# Altium PCB focus_stacking.PcbDoc
Units mil, origin at the board's own origin, x right, y up, seen from the top; angles counter-clockwise.
Board outline 11800 x 7870 mil, 2 copper layers (Top Layer, Bottom Layer); 15 components, 19 nets, 83 pads, 8 vias.
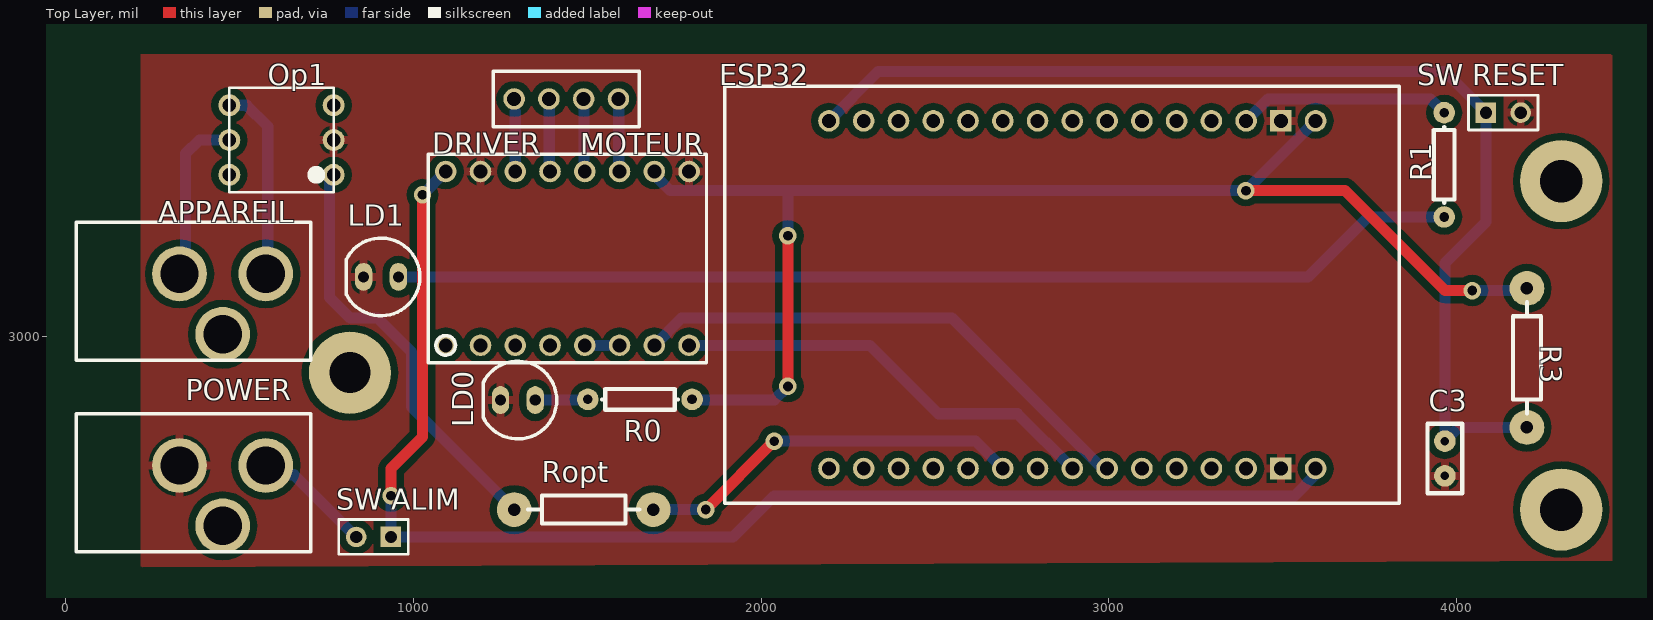
[diagram p0: Top Layer view]
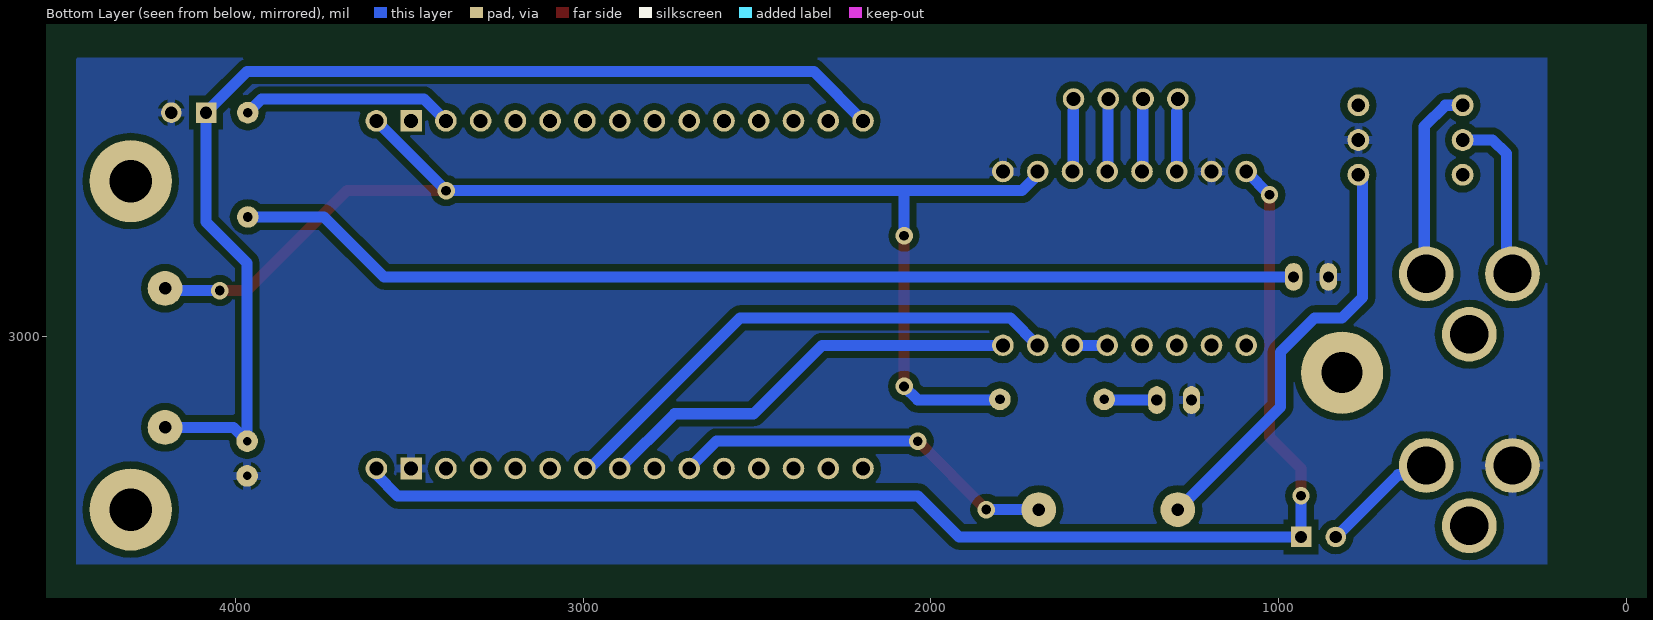
[diagram p1: Bottom Layer view, seen from below]

## Layer stack, top to bottom
Top Solder: solder mask 0.4, Solder Resist, Dk 3.5
Top Layer: signal copper 1.4
Dielectric1: dielectric 12.6, FR-4, Dk 4.8
Bottom Layer: signal copper 1.4
Bottom Solder: solder mask 0.4, Solder Resist, Dk 3.5

## Board outline
-5576.97,-1826.38 6223.03,-1826.38 6223.03,6043.62 -5576.97,6043.62

## Design rules (kind name [scope] priority, off if disabled: settings)
Clearance Clearance_bottom_polygon [OnLayer('Bottom Layer') Or OnLayer('Multi-Layer') vs OnLayer('Bottom Layer')  And  InPoly] p1: gap=20
Clearance Clearance_bottom_polygon_keepout [OnLayer('Bottom Layer') Or OnLayer('Multi-Layer') Or InPoly vs OnLayer('Keepout')] p2: gap=0
Clearance Clearance_top_polygon [OnLayer('Top Layer')  Or OnLayer('Multi-Layer') vs OnLayer('Top Layer') And InPoly] p3: gap=20
Clearance Clearance_bottom [OnLayer('Bottom Layer') Or OnLayer('Multi-Layer') vs OnLayer('Bottom Layer')  And Not InPoly] p4: gap=8
Clearance Clearance_top [OnLayer('Top Layer')  Or OnLayer('Multi-Layer') vs OnLayer('Top Layer') And Not InPoly] p5: gap=8
Clearance Clearance_pad_to_pad [OnLayer('Multi-Layer') vs OnLayer('Multi-Layer')] p6: gap=10
ComponentClearance ComponentClearance_bottom [OnLayer('Bottom Overlay') vs OnLayer('Bottom Overlay')] p1: gap=0 collisioncheckmode=3 verticalgap=10 showdistances=FALSE
ComponentClearance ComponentClearance_top [OnLayer('Top Overlay') vs OnLayer('Top Overlay')] p2: gap=0 collisioncheckmode=3 verticalgap=10 showdistances=FALSE
FabricationTestPointUsage TestPointUsage [All] p1: valid=0 allowmultiple=FALSE
FabricationTestpoint Testpoint [All] p1: side=3 testpointundercomponent=TRUE minsize=40 maxsize=100 preferedsize=60 minholesize=0 maxholesize=40 preferedholesize=32 testpointgrid=1 allowsidetop=TRUE allowsidebottom=TRUE usegrid=TRUE gridtolerance=0.01
HoleSize [All] p1: absolutevalues=TRUE maxlimit=1000 minlimit=16 maxpercent=80.000 minpercent=20.000
MinimumAnnularRing [PadXSize_AllLayers = PadYSize_AllLayers] p1: minimumring=10
PermittedLayers [All] p1: toplayerpermitted=TRUE bottomlayerpermitted=TRUE
PolygonConnect [All] p1: connectstyle=Relief reliefconductorwidth=24 reliefentries=4 polygonreliefangle="90 Angle" airgapwidth=10
RoutingVias [All] p1: holewidth=16 width=50 viastyle="Through Hole" minholewidth=16 minwidth=50 maxholewidth=1000 maxwidth=1000
SMDToPlane [All] p1: distance=0
SolderMaskExpansion [All] p1: expansion=4
ViasUnderSMD [All] p1: allowed=FALSE
Width Width_botom_top [OnLayer('Bottom Layer') or OnLayer('Top Layer')] p1: maxlimit=10000 minlimit=32 preferedwidth=32 minimp=50.000000 maximp=50.000000 favimp=50.000000
26 further rules are at their usual default settings.

## Components (designator, comment, footprint, x,y, rotation, side; value= is the part's Value field where it differs from the comment)
APPAREIL "Connecteur Power" "Connecteur Power" 699.09,3328.57 r180 top
C3 "CAP" RAD0.1 3966.81,2698.65 r270 top
DRIVER "Driver" Driver 1092.8,2974.24 r90 top
ESP32 "ESP32devKit" ESP32 2195.16,2619.91 r90 top
LD0 "comment" LED5 1250.28,2816.76 r270 top
LD1 "comment" LED5 856.57,3171.09 r270 top
MOTEUR "Moteur" Moteur 1289.65,3682.91 r90 top (schematic designator Moteur)
Op1 "Optocoupler" 4N26 620.35,3564.8 r180 top
POWER "Connecteur Power" "Connecteur Power" 699.09,2777.39 r180 top
R0 "RES" AXIAL0.3 1801.46,2816.76 r180 top
R1 "RES" AXIAL0.3 3966.81,3643.54 r270 top
R3 "RES" AXIAL0.4 4203.03,2738.02 r90 top (schematic designator R?)
Ropt "RES" AXIAL0.4 1289.65,2501.8 r0 top
"SW ALIM" "Header 2" HDR1X2 935.31,2423.06 r180 top
"SW RESET" "Header 2" HDR1X2 4084.92,3643.54 r0 top

## Footprints (in the part's own frame and the unit in brackets; to place one, negate y for a bottom-side part, rotate by r counter-clockwise, add the part's x,y. Pads: shape width x height; smd on the part's side, far side on the other; paste and mask are expansions set on the pad)
4N26 [mm]
  round 1.6 hole 1: 1(-3.81,2.54) 2(-3.81,0) 3(-3.81,-2.54) 4(3.81,-2.54) 5(3.81,0) 6(3.81,2.54)
  silkscreen extent -3.81,-3.81 3.81,3.81
AXIAL0.3 [mil]
  round 62 hole 28: 1(0,-2) 2(300,-2)
  silkscreen extent 41,-32 259,28
AXIAL0.4 [mil]
  round 100 hole 36: 1(0,0) 2(400,0)
  silkscreen extent 40,-40 360,40
"Connecteur Power" [mm]
  round 4 hole 2.8: 0(3.15,3.78) 1(9.45,3.78) 2(6.3,8.19)
  silkscreen extent -0.13,0 17.01,10.08
Driver [mm]
  round 1.575 hole 1.016: 1(0,0) 2(0,-2.54) 3(0,-5.08) 4(0,-7.62) 5(0,-10.16) 6(0,-12.7) 7(0,-15.24) 8(0,-17.78) 9(12.7,-17.78) 10(12.7,-15.24) 11(12.7,-12.7) 12(12.7,-10.16) 13(12.7,-7.62) 14(12.7,-5.08) 15(12.7,-2.54) 16(12.7,0)
  silkscreen extent -1.27,-19.05 13.97,1.27
ESP32 [mm]
  round 1.575 hole 1.016: 0(0,0) 1(0,-2.54) 2(0,-5.08) 3(0,-7.62) 4(0,-10.16) 5(0,-12.7) 6(0,-15.24) 7(0,-17.78) 8(0,-20.32) 9(0,-22.86) 10(0,-25.4) 11(0,-27.94) 12(0,-30.48) 14(0,-35.56) 15(25.4,-35.56) 17(25.4,-30.48) 18(25.4,-27.94) 19(25.4,-25.4) 20(25.4,-22.86) 21(25.4,-20.32) 22(25.4,-17.78) 23(25.4,-15.24) 24(25.4,-12.7) 25(25.4,-10.16) 26(25.4,-7.62) 27(25.4,-5.08) 28(25.4,-2.54) 29(25.4,0)
  rect 1.575x1.575 hole 1.016: 13(0,-33.02) 16(25.4,-33.02)
  silkscreen extent -2.54,-41.66 27.94,7.62
HDR1X2 [mm] "Connector; Header; 2 Position"
  rect 1.5x1.5 hole 0.9: 1(0,0)
  round 1.5 hole 0.9: 2(2.54,0)
  silkscreen extent -1.27,-1.27 3.81,1.27
LED5 [mil] "5mm LED"
  oval 80x50 hole 32: A(0,100) K(0,0)
  silkscreen extent -112,-50 112,162
Moteur [mm]
  round 1.575 hole 1.016: 1(0,0) 2(0,-2.54) 3(0,-5.08) 4(0,-7.62)
  silkscreen extent -2.03,-9.14 2.03,1.52
RAD0.1 [mil]
  round 62 hole 24: 1(0,0) 2(100,0)
  silkscreen extent -50,-50 150,50

## Part data
C3: "capacité non polarisée"
DRIVER: "Driver A4988"
LD0 LD1: library part LED, "LED 5mm/3mm/CMS"
R0 R1 R3 Ropt: "resistance"
"SW ALIM" "SW RESET": "Header, 2-Pin"

## Free pads (board coordinates)
  round 236.22 hole 118.11: 0(817.2,2895.5)
  round 236.22 hole 122.05: 1(4301.46,3446.69) 2(4301.46,2501.8)

## Via types
v1: diameter 50, hole 28, Top Layer to Bottom Layer, 8 vias

## Nets (pads, with @x,y where several pads share a name; then routed paths per layer and width w, separated by ;. In a path a pad name is that pad's centre, name@x,y a point inside that pad or via, vN(x,y) a via of type N, cw(c..) or ccw(c..) an arc to the next point about the centre after c; other vN are vias at no path point)
GND: "SW RESET.2" C3.2 DRIVER.9 DRIVER.15 ESP32.13 ESP32.16 LD0.K LD1.K Op1.2 POWER.1
NetAPPAREIL_0: APPAREIL.0 Op1.4 | length 578.9
  Bottom Layer w32: Op1.4 520.35,3664.8 580.98,3604.17 580.98,3225.03 APPAREIL.0@535.71,3179.76
NetAPPAREIL_1: APPAREIL.1 Op1.5 | length 511.2
  Bottom Layer w32: APPAREIL.1@287.68,3179.76 344.76,3236.84 344.76,3525.43 384.13,3564.8 Op1.5
NetC3_1: "SW RESET.1" C3.1 ESP32.29 R3.1 | length 3243.7
  Bottom Layer w32: ESP32.29 2336.89,3761.65 3966.81,3761.65 4084.92,3643.54 4084.92,3328.57 3966.81,3210.46 C3.1 4006.18,2738.02 R3.1
NetDRIVER_5: DRIVER.5 DRIVER.6 | length 100
  Bottom Layer w32: DRIVER.5 DRIVER.6
NetDRIVER_7: DRIVER.7 ESP32.8 | length 1514.4
  Bottom Layer w32: DRIVER.7 1771.54,3052.98 2549.49,3052.98 2982.56,2619.91 ESP32.8
NetDRIVER_8: DRIVER.8 ESP32.7 | length 1249.1
  Bottom Layer w32: DRIVER.8 2313.27,2974.24 2510.12,2777.39 2737.68,2777.39 ESP32.7
NetDRIVER_10: DRIVER.10 ESP32.15 R0.1 R3.2 | length 3803.9
  Top Layer w32: v1(2077.05,2856.13) v1(2077.05,3289.2) ; v1(3394.48,3419.24) 3679.3,3419.24 3966.81,3131.72 v1(4045.55,3131.72)
  Bottom Layer w32: DRIVER.10 1682.79,3474.24 1737.79,3419.24 2077.05,3419.24 ; R0.1@1801.46,2816.76 2037.68,2816.76 v1(2077.05,2856.13) ; v1@2077.05,3298.83 2077.05,3419.24 ; ESP32.15 v1(3394.48,3419.24) 2077.05,3419.24 ; v1(4045.55,3131.72) 4196.73,3131.72 R3.2
NetDRIVER_11: DRIVER.11 MOTEUR.4 | length 175.9
  Bottom Layer w32: 1590.43,3649.12 1590.43,3476.61 DRIVER.11
NetDRIVER_12: DRIVER.12 MOTEUR.3 | length 186.4
  Bottom Layer w32: MOTEUR.3@1490.43,3659.68 1490.43,3476.61 DRIVER.12
NetDRIVER_13: DRIVER.13 MOTEUR.2 | length 175.9
  Bottom Layer w32: 1390.43,3649.12 1390.43,3476.61 DRIVER.13
NetDRIVER_14: DRIVER.14 MOTEUR.1 | length 172.5
  Bottom Layer w32: DRIVER.14 1292.8,3646.76
NetDRIVER_16: "SW ALIM.1" DRIVER.16 ESP32.14 | length 3867.9
  Top Layer w32: v1(935.31,2541.17) 935.31,2619.91 1025.87,2710.46 v1(1025.87,3407.31)
  Bottom Layer w32: v1(935.31,2541.17) 935.31,2423.06 1919.57,2423.06 2037.68,2541.17 3533.74,2541.17 3595.16,2602.59 ESP32.14 ; v1(1025.87,3407.31) DRIVER.16
NetESP32_5: ESP32.5 Ropt.2 | length 1119.7
  Top Layer w32: v1(1840.83,2501.8) v1(2037.68,2698.65)
  Bottom Layer w32: Ropt.2 v1(1840.83,2501.8) ; v1(2037.68,2698.65) 2616.42,2698.65 ESP32.5
NetESP32_17: ESP32.17 R1.1 | length 614.9
  Bottom Layer w32: ESP32.17 3458.15,3682.91 3925.44,3682.91 R1.1@3966.81,3641.54
NetLD0_A: LD0.A R0.2 | length 151.2
  Bottom Layer w32: LD0.A R0.2@1501.46,2816.76
NetLD1_A: LD1.A R1.2 | length 3079.7
  Bottom Layer w32: LD1.A 995.94,3171.09 3573.11,3171.09 3745.55,3343.54 R1.2
NetOp1_1: Op1.1 Ropt.1 | length 1234.3
  Bottom Layer w32: Op1.1 758.15,3452.59 758.15,3112.04 817.2,3052.98 895.95,3052.98 994.37,2954.56 994.37,2797.08 Ropt.1
NetPOWER_0: "SW ALIM.2" POWER.0 | length 322.1
  Bottom Layer w32: POWER.0@587.28,2601.8 656.57,2601.8 835.31,2423.06
pads on no net: APPAREIL.2 DRIVER.1 DRIVER.2 DRIVER.3 DRIVER.4 ESP32.0 ESP32.1 ESP32.2 ESP32.3 ESP32.4 ESP32.6 ESP32.9 ESP32.10 ESP32.11 ESP32.12 ESP32.18 ESP32.19 ESP32.20 ESP32.21 ESP32.22 ESP32.23 ESP32.24 ESP32.25 ESP32.26 ESP32.27 ESP32.28 Op1.3 Op1.6 POWER.2

## Polygon pours and split planes (outlines as drawn)
GND on Bottom Layer "Top Layer-No Net" (solid, pour order 8): 226.65,3801.02 4458.94,3801.02 4458.94,2344.32 226.65,2344.32
GND on Top Layer "Top Layer-No Net" (solid, pour order 10): 215.65,2335.72 215.65,3812.1 4447.93,3812.1 4447.93,2353.89

## Keep-outs
Keep-Out Layer:
  rectangle: -5539.17,-1819.28 -5342.32,6054.73
  rectangle: -5342.32,-1819.28 6075,-1622.43
  rectangle: 5878.15,-1622.43 6075,6054.73
  rectangle: -5342.32,5857.88 5878.15,6054.73

## Silkscreen, mask and mechanical layers (free items; w line width, h text height)
Mechanical 1:
  lines w32: 226.65,2344.32 226.65,3801.02 4458.94,3801.02 4458.94,2344.32 226.65,2344.32
Mechanical 32:
  text "Les bandes en violet delimitent la surface utilisable...." at -5030,6664 h200
  text "Mais vous n'etes pas obliges de tout utiliser!!" at -4330,6248 h200
  text "ATTENTION:" at 6521,5511 h200
  text "Par defaut, les pistes" at 6521,5101 h200
  text "ont 32mil de largeur" at 6516,4723 h200
  text "En cas de besoin, cette largeur" at 6527,4361 h200
  text "peut etre reduite jusqu'a 10 mil" at 6516,3953 h200
  text "Par defaut, les vias" at 6544,3254 h200
  text "ont un diam. de 50 mil" at 6538,2854 h200
  text "En cas de besoin, ce diam." at 6504,2378 h200
  text "peut etre reduit jusqu'a 36 mil" at 6528,1948 h200